# Altium PCB WB-AV-4503-Switching-Circuit-REV-0.pcbdoc
Units mm, origin at the board's own origin, x right, y up, seen from the top; angles counter-clockwise.
Board outline 59.56 x 71.48 mm, 2 copper layers (Top Layer, Bottom Layer), stack 1.671 mm thick; 15 components, 8 nets, 81 pads, 122 vias.
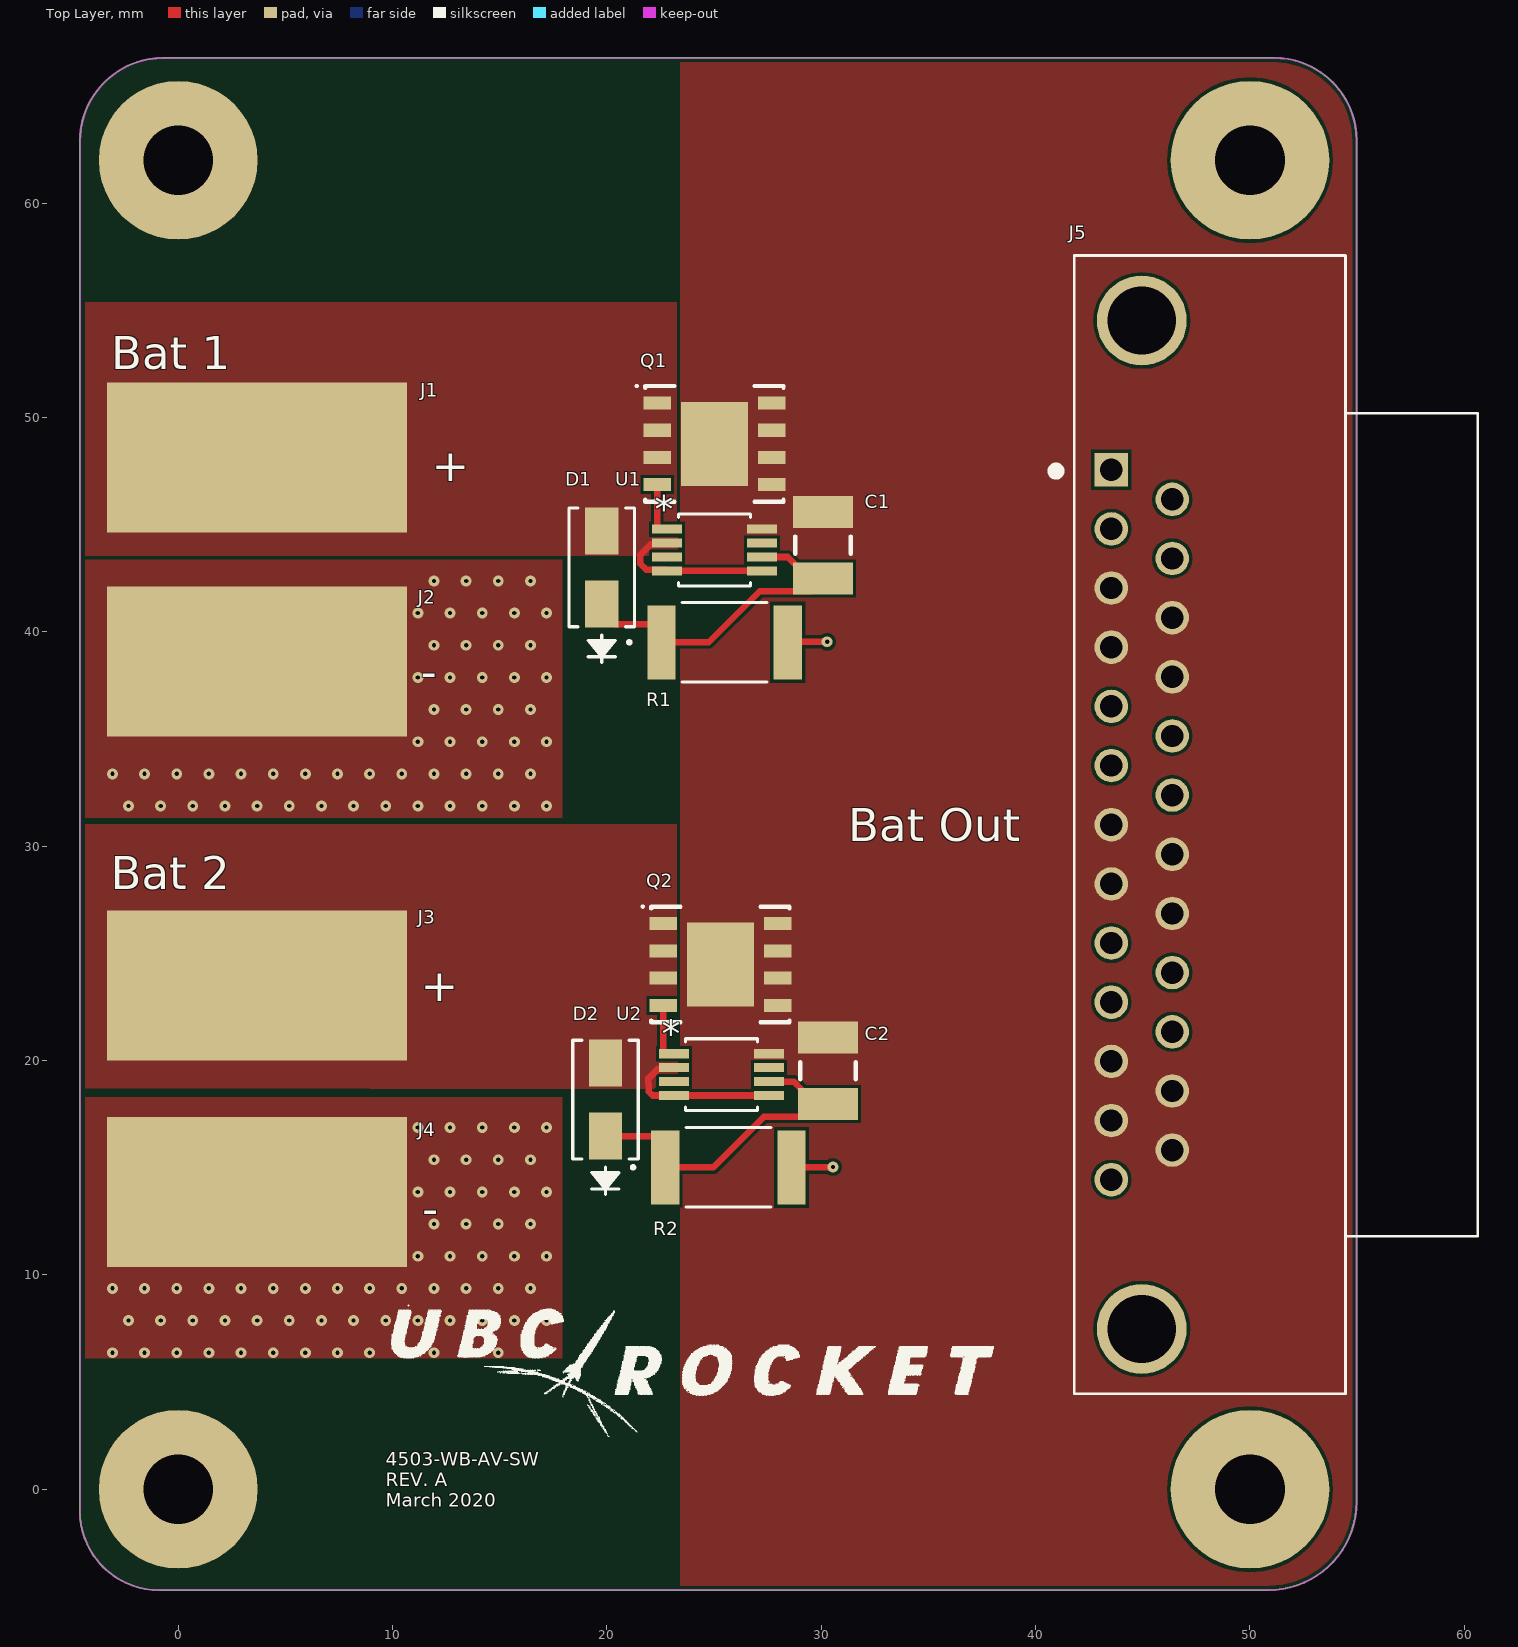
[diagram p0: Top Layer view]
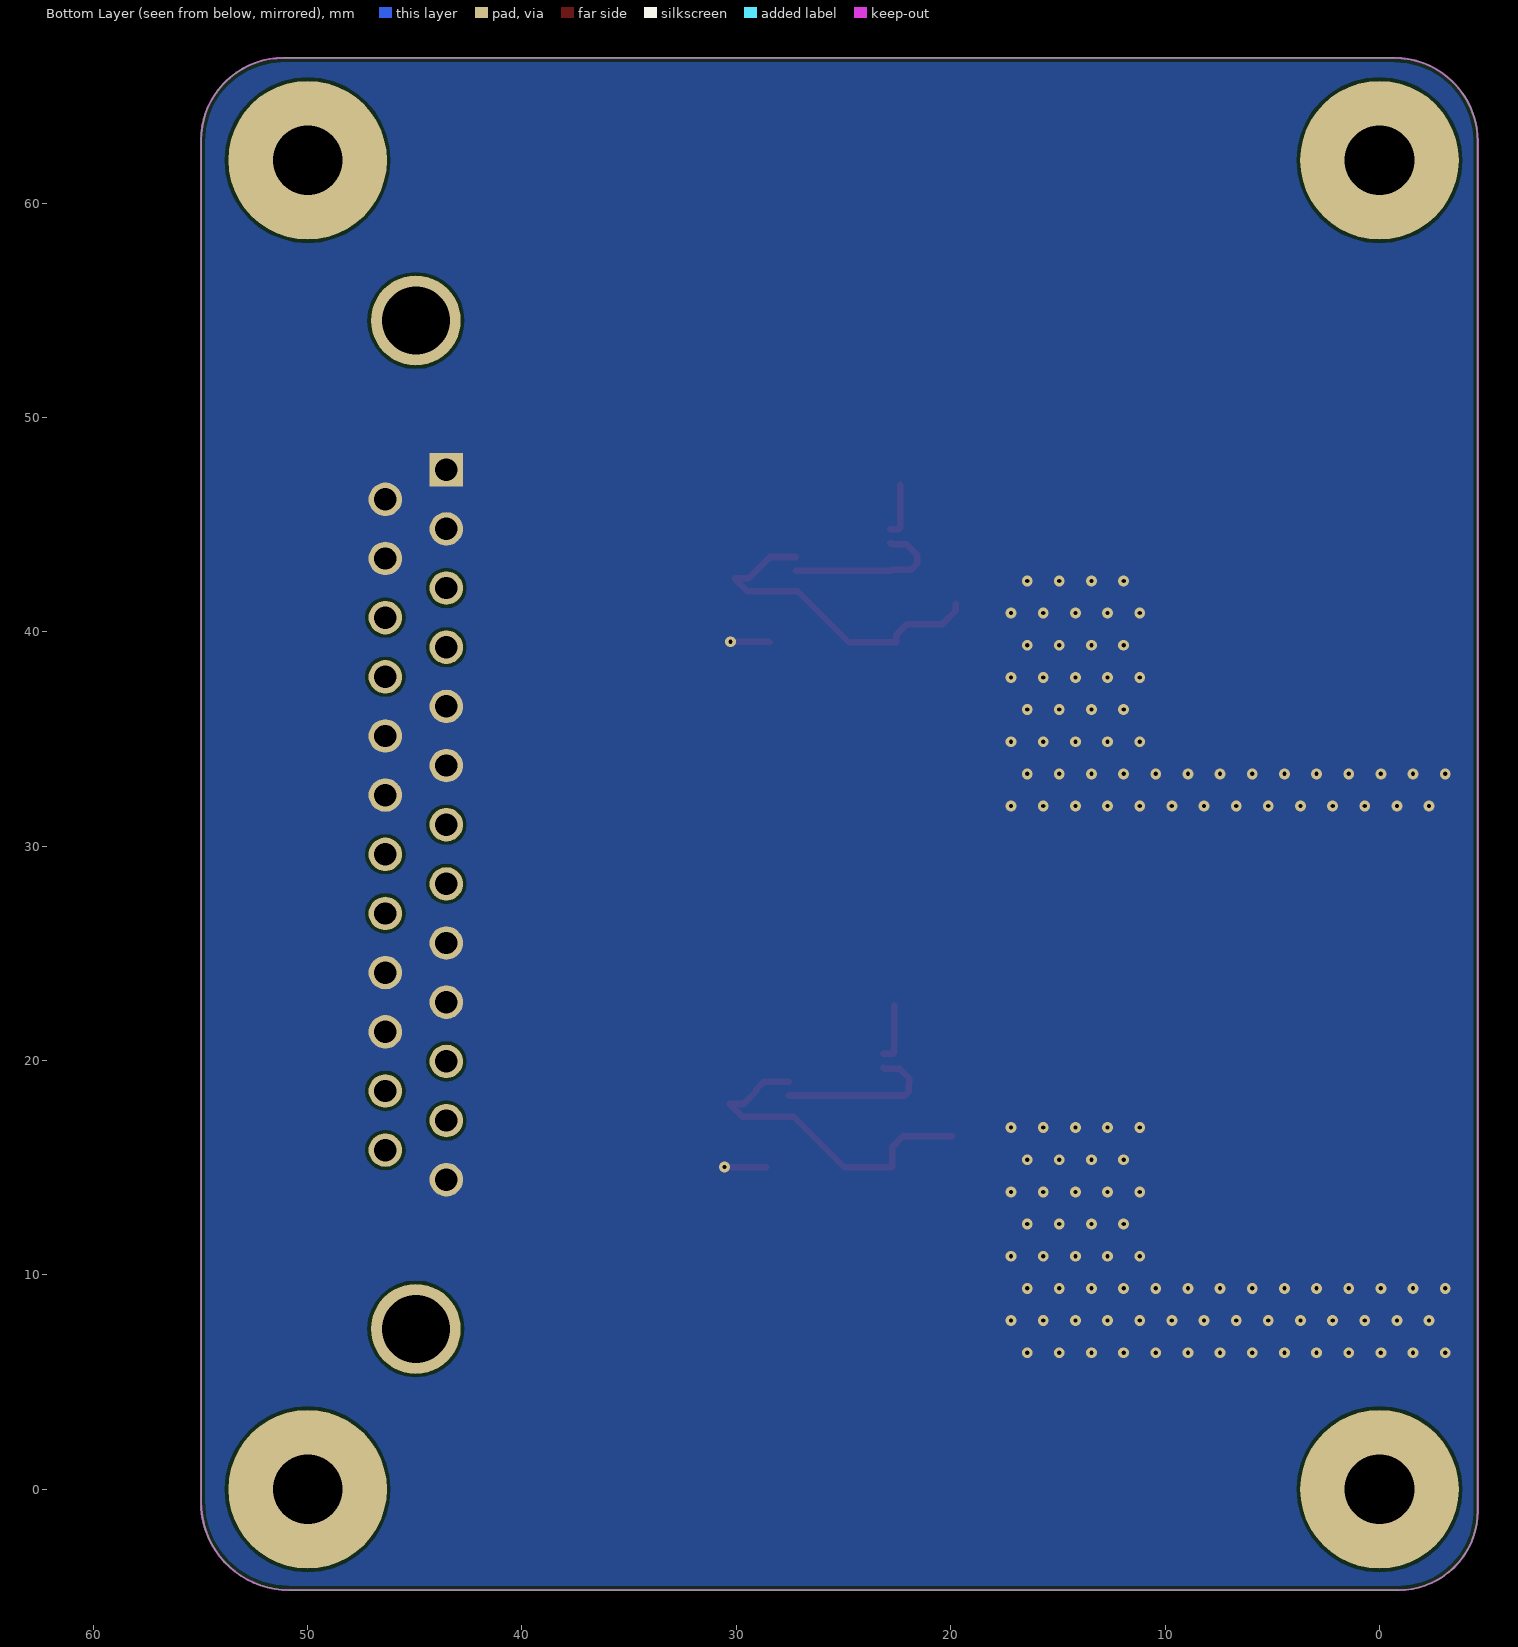
[diagram p1: Bottom Layer view, seen from below]
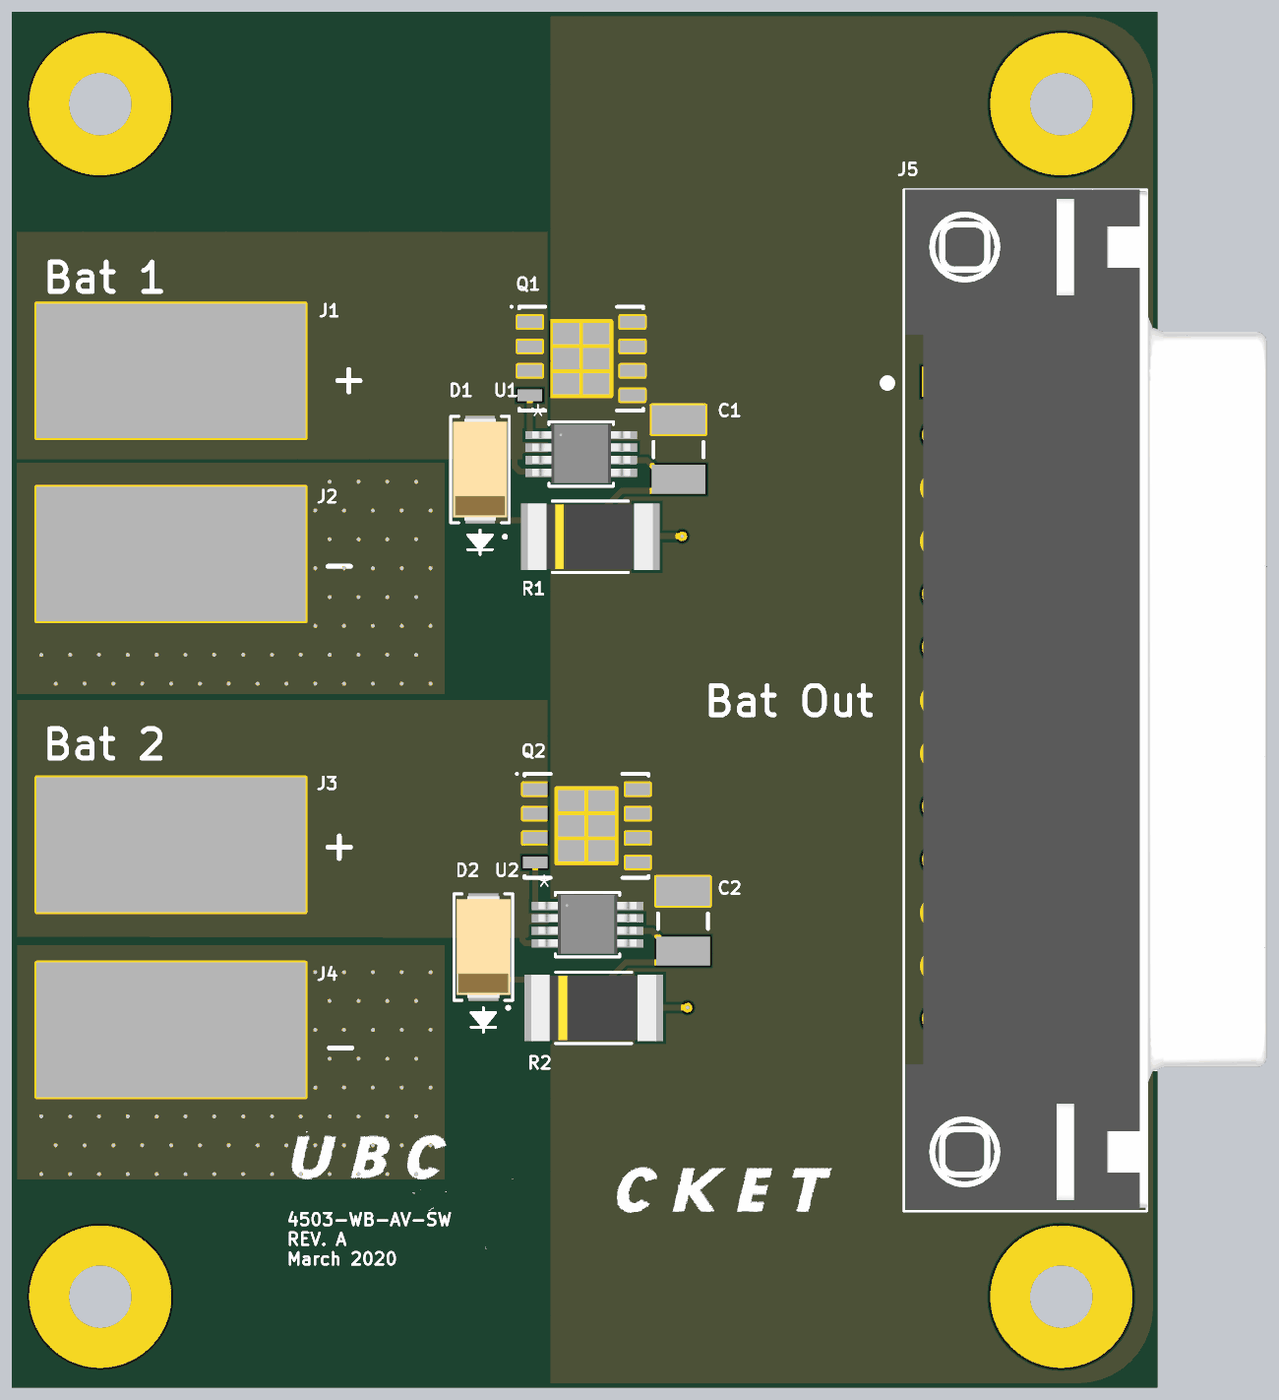
[diagram p2: 3D render of the assembled board from above, using the file's embedded part models]

## Layer stack, top to bottom
Top Solder: solder mask 0.0102, Solder Resist, Dk 3.5
Top Layer: signal copper 0.0356
Dielectric 1: dielectric 1.6, FR-4, Dk 4.8
Bottom Layer: signal copper 0.0356
Bottom Solder: solder mask 0.0102, Solder Resist, Dk 3.5

## Board outline
-0.892,-4.705 50.862,-4.705 ccw(c50.862,-0.594) 54.973,-0.594 54.973,62.924 ccw(c51.124,62.924) 51.124,66.773 -0.684,66.773 ccw(c-0.684,62.873) -4.584,62.873 -4.584,-1.013 ccw(c-0.892,-1.013)

## Design rules (kind name [scope] priority, off if disabled: settings)
Clearance [All] p1: gap=0.152 ignorepadtopadclearanceinfootprint=FALSE except(0: Arc-Hole Track-Hole SMDPad-Hole THPad-Hole Via-Hole Fill-Hole Poly-Hole Region-Hole Text-Hole)
ComponentClearance [All] p1: gap=0 collisioncheckmode=3 verticalgap=0.003 showdistances=FALSE
HoleSize [All] p1: absolutevalues=TRUE maxlimit=25.4 minlimit=0.025 maxpercent=80.000 minpercent=20.000
MinimumSolderMaskSliver [All] p1: minsoldermaskwidth=0.025
PolygonConnect [All] p1: connectstyle=Direct reliefconductorwidth=0.254 reliefentries=4 polygonreliefangle="90 Angle" airgapwidth=0.254
RoomDefinition "Redundant Batteries" [InComponentClass('Redundant Batteries')] p1: confinementstyle=ConfineIn formatcopy=TRUE lockcomponents=FALSE outline -3.419,2.884 60.869,2.884 60.869,67.834 -3.419,67.834
RoutingVias [All] p1: holewidth=0.2 width=0.505 viastyle="Through Hole" minholewidth=0.2 minwidth=0.505 maxholewidth=0.711 maxwidth=1.27
SilkToSilkClearance [All] p1: silktosilkclearance=0.025
SilkToSolderMaskClearance [IsPad] p1: minsilkscreentomaskgap=0.025 clearancetoexposedcopper=TRUE
SolderMaskExpansion [All] p1: expansion=0.102 istentingtop=FALSE
Width [All] p1: maxlimit=5.08 minlimit=0.254 preferedwidth=0.305
25 further rules are at their usual default settings.

## Components (designator, comment, footprint, x,y, rotation, side; value= is the part's Value field where it differs from the comment)
C1 "Cap" C1210_M 30.081,44.042 r90 top value=1.5uF
C2 "Cap" C1210_M 30.316,19.523 r90 top value=1.5uF
D1 "SMAJ24CA-E3/61" DIODE_DO-214AC 19.76,43.003 r90 top
D2 "SMAJ24CA-E3/61" DIODE_DO-214AC 19.934,18.176 r90 top
J1 "Socket" PCBComponent_1 3.683,48.133 r180 top
J2 "Socket" PCBComponent_1 3.683,38.608 r180 top
J3 "Socket" PCBComponent_1 3.683,23.495 r180 top
J4 "Socket" PCBComponent_1 3.683,13.868 r180 top
J5 "5747846-4" *TE_5747846-4 44.952,31 r90 top
Q1 "FDMS86101A" FDMS86101A 25.019,48.768 r0 top
Q2 "FDMS86101A" FDMS86101A 25.297,24.48 r0 top
R1 "Res1" STA_RMCF2512 25.495,39.511 r0 top value=1K
R2 "Res1" STA_RMCF2512 25.665,15.017 r0 top value=1K
U1 "Part Number: LTC4359IMS8#PBF" MSOP-8_MS 25.019,43.815 r0 top value=Value
U2 "Part Number: LTC4359IMS8#PBF" MSOP-8_MS 25.348,19.344 r0 top value=Value

## Footprints (in the part's own frame and the unit in brackets; to place one, negate y for a bottom-side part, rotate by r counter-clockwise, add the part's x,y. Pads: shape width x height; smd on the part's side, far side on the other; paste and mask are expansions set on the pad)
*TE_5747846-4 [mil]
  rect 61.5x61.5 hole 41: 1(651.97,56)
  round 61.5 hole 41: 2(543.31,56) 3(434.65,56) 4(325.98,56) 5(217.32,56) 6(108.66,56) 7(0,56) 8(-108.66,56) 9(-217.32,56) 10(-325.98,56) 11(-434.65,56) 12(-543.31,56) 13(-651.97,56) 14(597.64,-56) 15(488.98,-56) 16(380.32,-56) 17(271.65,-56) 18(162.99,-56) 19(54.33,-56) 20(-54.33,-56) 21(-162.99,-56) 22(-271.65,-56) 23(-380.31,-56) 24(-488.98,-56) 25(-597.64,-56)
  round 165 hole 125: G1(-926,0) G2(926,0)
  silkscreen extent -1045,-617 1045,165, body extent -1042,-619 1046,121, height 494
C1210_M [mm] "Chip Capacitor, Body 3.2x2.5mm, IPC Low Density"
  rect 1.5x2.8 smd: 1(-1.55,0) 2(1.55,0)
  silkscreen extent -0.4,-1.3 0.4,1.3, body extent -1.7,-1.35 1.7,1.35, height 1.5
DIODE_DO-214AC [mil]
  rect 86x61 smd paste+0 mask+0: 1(-67,0) 2(67,0)
  silkscreen extent -174,-60 109,60, body extent -104,-55 104,55, height 92
FDMS86101A [mm] "SON, 8-Leads, Body 5.10x6.15mm, Pitch 1.27mm, Thermal Pad 3.91x3.13mm, IPC Medium Density"
  rect 1.27x0.61 smd: 1(-2.67,1.905) 2(-2.67,0.635) 3(-2.67,-0.635) 4(-2.67,-1.905) 5(2.67,-1.905) 6(2.67,-0.635) 7(2.67,0.635) 8(2.67,1.905)
  rect 3.13x3.91 smd paste-1.565: 9(0,0)
  silkscreen extent -3.67,-2.7 3.22,2.75, body extent -3.08,-2.55 3.08,2.55, height 1.1
MSOP-8_MS [mil]
  rect 55x17 smd paste+0 mask+0: 1(-87,38.39) 2(-87,12.8) 3(-87,-12.8) 4(-87,-38.39) 5(87,-38.39) 6(87,-12.8) 7(87,12.8) 8(87,38.39)
  silkscreen extent -66,-66 66,66, body extent -101,-60 101,62, height 43
PCBComponent_1 [mm]
  rect 14x7 smd: 1(0,0)
STA_RMCF2512 [mil]
  rect 52x136 smd paste+0 mask+0: 1(-116,0) 2(116,0)
  silkscreen extent -178,-73 78,73, body extent -128,-68 128,68, height 28

## Part data
C1 C2: "Capacitor", LatestRevisionDate=17-Jul-2002, LatestRevisionNote="Re-released for DXP Platform.", PackageDescription="Radial Cap, Thru-Hole; 2 Leads; 0.3 in Pin Spacing", PackageReference=RAD-0.3, Published=8-Jun-2000, Publisher="Altium Limited", SPN=445-7586-1-ND
D1 D2: library part Diode, "Default Diode", Code_JEDEC=DO-214-AB, LatestRevisionDate=17-Jul-2002, LatestRevisionNote="Re-released for DXP Platform.", PackageDescription="DO-214-AB/SMC; 2 C-Bend Leads; Body 7.9 x 5.9 mm, inc. leads (LxW)", PackageReference=SMC, PackageVersion=Sep-1996, Published=8-Jun-2000, Publisher="Altium Limited", SPN=SMAJ24CA-E3/61GICT-ND
Q1 Q2: "MOSFET N-CH 100V 13A POWER56", SPN=FDMS86101ACT-ND
R1 R2: "Resistor", LatestRevisionDate=17-Jul-2002, LatestRevisionNote="Re-released for DXP Platform.", PackageDescription="Axial Device, Thru-Hole; 2 Leads; 0.3 in Pin Spacing", PackageReference=AXIAL-0.3, Published=8-Jun-2000, Publisher="Altium Limited", SPN=RMCF2512JT1K00CT-ND
U1 U2: library part LTC4359IMS8#PBF, "No Description Available", Built_By=EMA_UL_Team, Copyright="Copyright (C) 2018 Accelerated Designs. All rights reserved", Manufacturer_Part_Number=LTC4359IMS8#PBF, RefDes=RefDes, Type=DEV, Vendor="Linear Technology"
J1 J2 J3 J4: LatestRevisionDate=17-Jul-2002, LatestRevisionNote="Re-released for DXP Platform.", Publisher="Altium Limited"
J5: SnapEDA_Link=https://www.snapeda.com/parts/5747846-4/TE%20Connectivity%20AMP%20Connectors/view-part/2759124/?ref=snap

## Free pads (board coordinates)
  round 7.4 hole 3.251: 1(0,0) 1(0,62) 1(50,0) 1(50,62)

## Via types
v1: diameter 0.505, hole 0.2, Top Layer to Bottom Layer, tented both sides, 120 vias
v2: diameter 0.505, hole 0.2, Top Layer to Bottom Layer, 2 vias

## Nets (pads, with @x,y where several pads share a name; then routed paths per layer and width w, separated by ;. In a path a pad name is that pad's centre, name@x,y a point inside that pad or via, vN(x,y) a via of type N, cw(c..) or ccw(c..) an arc to the next point about the centre after c; other vN are vias at no path point)
Bat1: D1.2 J1.1 Q1.1 Q1.2 Q1.3 U1.2 U1.4 U1.5 | length 7.7
  Top Layer w0.305: U1.2 22.746,44.077 22.05,44.077 21.562,43.588 21.562,43.176 21.834,42.904 22.746,42.904 U1.4 U1.5
Bat2: D2.2 J3.1 Q2.1 Q2.2 Q2.3 U2.2 U2.4 U2.5 | length 7.7
  Top Layer w0.305: U2.2 23.074,19.606 22.379,19.606 21.94,19.167 21.94,18.914 21.958,18.896 21.958,18.548 22.137,18.369 U2.4 U2.5
GND: J2.1 J4.1 J5.1 J5.2 J5.5 J5.6 J5.9 J5.10 J5.13 J5.14 J5.15 J5.18 J5.19 J5.22 J5.23 R1.2 R2.2 | length 3.8
  Top Layer w0.305: R1.2 28.462,39.532 v2(30.274,39.532) ; R2.2 28.623,15.029 v2(30.552,15.029)
  other v1: -3.066,6.372 -1.566,6.372 -0.066,6.372 1.434,6.372 2.934,6.372 4.434,6.372 5.934,6.372 7.434,6.372 8.934,6.372 10.434,6.372 11.934,6.372 13.434,6.372 14.934,6.372 16.434,6.372 -2.316,7.872 -0.816,7.872 0.684,7.872 2.184,7.872 3.684,7.872 5.184,7.872 6.684,7.872 8.184,7.872 9.684,7.872 11.184,7.872 12.684,7.872 14.184,7.872 15.684,7.872 17.184,7.872 -3.066,9.372 -1.566,9.372 -0.066,9.372 1.434,9.372 2.934,9.372 4.434,9.372 5.934,9.372 7.434,9.372 8.934,9.372 10.434,9.372 11.934,9.372 13.434,9.372 14.934,9.372 16.434,9.372 11.184,10.872 12.684,10.872 14.184,10.872 15.684,10.872 17.184,10.872 11.934,12.372 13.434,12.372 14.934,12.372 16.434,12.372 11.184,13.872 12.684,13.872 14.184,13.872 15.684,13.872 17.184,13.872 11.934,15.372 13.434,15.372 14.934,15.372 16.434,15.372 11.184,16.872 12.684,16.872 14.184,16.872 15.684,16.872 17.184,16.872 -2.316,31.872 -0.816,31.872 0.684,31.872 2.184,31.872 3.684,31.872 5.184,31.872 6.684,31.872 8.184,31.872 9.684,31.872 11.184,31.872 12.684,31.872 14.184,31.872 15.684,31.872 17.184,31.872 -3.066,33.372 -1.566,33.372 -0.066,33.372 1.434,33.372 2.934,33.372 4.434,33.372 5.934,33.372 7.434,33.372 8.934,33.372 10.434,33.372 11.934,33.372 13.434,33.372 14.934,33.372 16.434,33.372 11.184,34.872 12.684,34.872 14.184,34.872 15.684,34.872 17.184,34.872 11.934,36.372 13.434,36.372 14.934,36.372 16.434,36.372 11.184,37.872 12.684,37.872 14.184,37.872 15.684,37.872 17.184,37.872 11.934,39.372 13.434,39.372 14.934,39.372 16.434,39.372 11.184,40.872 12.684,40.872 14.184,40.872 15.684,40.872 17.184,40.872 11.934,42.372 13.434,42.372 14.934,42.372 16.434,42.372
NetC1_1: C1.1 D1.1 R1.1 U1.6 | length 15.9
  Top Layer w0.305: D1.1 19.76,40.984 20.382,40.361 22.041,40.361 22.549,39.853 R1.1 24.753,39.511 27.137,41.894 29.483,41.894 C1.1 29.431,42.492 28.433,43.49 U1.6
NetC2_1: C2.1 D2.1 R2.1 U2.6 | length 16
  Top Layer w0.305: D2.1 22.211,16.474 22.719,15.966 R2.1 24.968,15.017 27.327,17.375 29.718,17.375 C2.1 29.666,17.973 29.068,18.571 29.068,18.664 28.713,19.019 U2.6
NetQ1_4: Q1.4 U1.1 | length 2.5
  Top Layer w0.305: Q1.4 22.349,44.853 22.413,44.79 U1.1
NetQ2_4: Q2.4 U2.1 | length 2.7
  Top Layer w0.305: Q2.4 22.627,20.383 22.69,20.319 U2.1
Vs: C1.2 C2.2 J5.3 J5.4 J5.7 J5.8 J5.11 J5.12 J5.16 J5.17 J5.20 J5.21 J5.24 J5.25 Q1.5 Q1.6 Q1.7 Q1.8 Q1.9 Q2.5 Q2.6 Q2.7 Q2.8 Q2.9 U1.8 U2.8
pads on no net: J5.G1 J5.G2 U1.3 U1.7 U2.3 U2.7

## Polygon pours and split planes (outlines as drawn)
GND on Top Layer "GND_L01_P005" (solid, pour order 5): -4.33,6.102 17.907,6.102 17.907,18.276 -4.33,18.276
GND on Top Layer "GND_L01_P004" (solid, pour order 4): -4.338,31.328 17.907,31.328 17.907,43.355 -4.338,43.355
Bat2 on Top Layer "BAT2_L01_P003" (solid, pour order 3): -4.33,18.713 23.312,18.655 23.312,31.014 -4.33,31.014
Bat1 on Top Layer "BAT1_L01_P002" (solid, pour order 2): -4.338,43.546 23.302,43.546 23.302,55.372 -4.338,55.372
Vs on Top Layer "VS_L01_P001" (solid, pour order 1): 23.432,-4.705 54.859,-4.705 54.859,66.653 23.432,66.653
GND on Bottom Layer "GND_L02_P000" (solid, pour order 0): -0.892,-4.705 50.862,-4.705 ccw(c50.862,-0.645) 54.922,-0.645 54.922,62.975 ccw(c51.124,62.975) 51.124,66.773 -0.684,66.773 ccw(c-0.684,62.86) -4.597,62.86 -4.597,-1 ccw(c-0.892,-1)

## Keep-outs
Keep-Out Layer:
  the board outline again, w0.1

## Silkscreen, mask and mechanical layers (free items; w line width, h text height)
Top Overlay:
  drawing of 28 lines, arcs and shapes, not listed
  text "Bat 1" at -3.128,52.252 h1.52
  text "+" at 11.821,47.031 h1.52
  text "-" at 11.32,37.379 h1.52
  text "Bat Out" at 31.261,30.238 h1.52
  text "Bat 2" at -3.15,27.989 h1.52
  text "+" at 11.32,22.774 h1.52
  text "-" at 11.394,12.338 h1.52
  text "4503-WB-AV-SW / REV. A / March 2020" at 9.687,-0.817 h0.64

## Text inside footprints (layer, text, board x,y; h text height)
D1: Mechanical 7 "0.06in/1.524mm" at 23.57,38.901 h0.64 r90; Mechanical 7 "0.208in/5.283mm" at 26.11,40.622 h0.64 r90; Mechanical 7 "0.11in/2.794mm" at 20.078,50.369 h0.64 r90; Mechanical 7 "0.065in/1.651mm" at 20.078,47.829 h0.64 r90; Mechanical 7 "Alt 2 Padstyle: OX90Y60D30P" at 31.952,34.431 h1.27 r90; Mechanical 7 "Alt 1 Padstyle: OX60Y90D30P" at 30.047,34.431 h1.27 r90; Mechanical 7 "Default Padstyle: RX86Y61D0T" at 28.142,34.113 h1.27 r90
D2: Mechanical 7 "0.06in/1.524mm" at 23.744,14.074 h0.64 r90; Mechanical 7 "0.208in/5.283mm" at 26.284,15.795 h0.64 r90; Mechanical 7 "0.11in/2.794mm" at 20.251,25.542 h0.64 r90; Mechanical 7 "0.065in/1.651mm" at 20.251,23.002 h0.64 r90; Mechanical 7 "Alt 2 Padstyle: OX90Y60D30P" at 32.126,9.604 h1.27 r90; Mechanical 7 "Alt 1 Padstyle: OX60Y90D30P" at 30.221,9.604 h1.27 r90; Mechanical 7 "Default Padstyle: RX86Y61D0T" at 28.316,9.286 h1.27 r90
R1: Mechanical 7 "0.038in/0.965mm" at 25.882,34.101 h0.64; Mechanical 7 "0.256in/6.502mm" at 23.114,44.286 h0.64; Mechanical 7 "0.136in/3.454mm" at 31.794,39.194 h0.64; Mechanical 7 "Alt 2 Padstyle: OX90Y60D30P" at 16.923,27.878 h1.27; Mechanical 7 "Alt 1 Padstyle: OX60Y90D30P" at 16.923,29.402 h1.27; Mechanical 7 "Default Padstyle: RX52Y136D0T" at 16.288,30.926 h1.27
R2: Mechanical 7 "0.038in/0.965mm" at 26.052,9.607 h0.64; Mechanical 7 "0.256in/6.502mm" at 23.284,19.792 h0.64; Mechanical 7 "0.136in/3.454mm" at 31.964,14.7 h0.64; Mechanical 7 "Alt 2 Padstyle: OX90Y60D30P" at 17.093,3.384 h1.27; Mechanical 7 "Alt 1 Padstyle: OX60Y90D30P" at 17.093,4.908 h1.27; Mechanical 7 "Default Padstyle: RX52Y136D0T" at 16.458,6.432 h1.27
U1: Top Overlay "*" at 22.238,45.095 h1.27; Mechanical 13 "*" at 23.533,44.018 h1.27; Mechanical 7 "0.027in/0.686mm" at 20.428,39.218 h0.64; Mechanical 7 "0.026in/0.65mm" at 15.316,44.147 h0.64; Mechanical 7 "0.122in/3.099mm" at 29.616,43.497 h0.64; Mechanical 7 "0.201in/5.105mm" at 22.638,49.682 h0.64; Mechanical 7 "0.122in/3.099mm" at 22.638,47.777 h0.64; Mechanical 7 "Alt 2 Padstyle: OX90Y60D30P" at 16.446,29.566 h1.27; Mechanical 7 "Alt 1 Padstyle: OX60Y90D30P" at 16.446,31.09 h1.27; Mechanical 7 "Pin One Padstyle: RX55Y17D0T" at 16.129,35.662 h1.27; Mechanical 7 "Default Padstyle: RX55Y17D0T" at 16.129,37.186 h1.27
U2: Top Overlay "*" at 22.566,20.624 h1.27; Mechanical 13 "*" at 23.862,19.548 h1.27; Mechanical 7 "0.027in/0.686mm" at 20.757,14.747 h0.64; Mechanical 7 "0.026in/0.65mm" at 15.645,19.677 h0.64; Mechanical 7 "0.122in/3.099mm" at 29.945,19.027 h0.64; Mechanical 7 "0.201in/5.105mm" at 22.966,25.212 h0.64; Mechanical 7 "0.122in/3.099mm" at 22.966,23.307 h0.64; Mechanical 7 "Alt 2 Padstyle: OX90Y60D30P" at 16.775,5.095 h1.27; Mechanical 7 "Alt 1 Padstyle: OX60Y90D30P" at 16.775,6.619 h1.27; Mechanical 7 "Pin One Padstyle: RX55Y17D0T" at 16.458,11.191 h1.27; Mechanical 7 "Default Padstyle: RX55Y17D0T" at 16.458,12.715 h1.27